# EAGLE board Schematic with only shield - Bottom Routing (EAGLE 6.5.0)
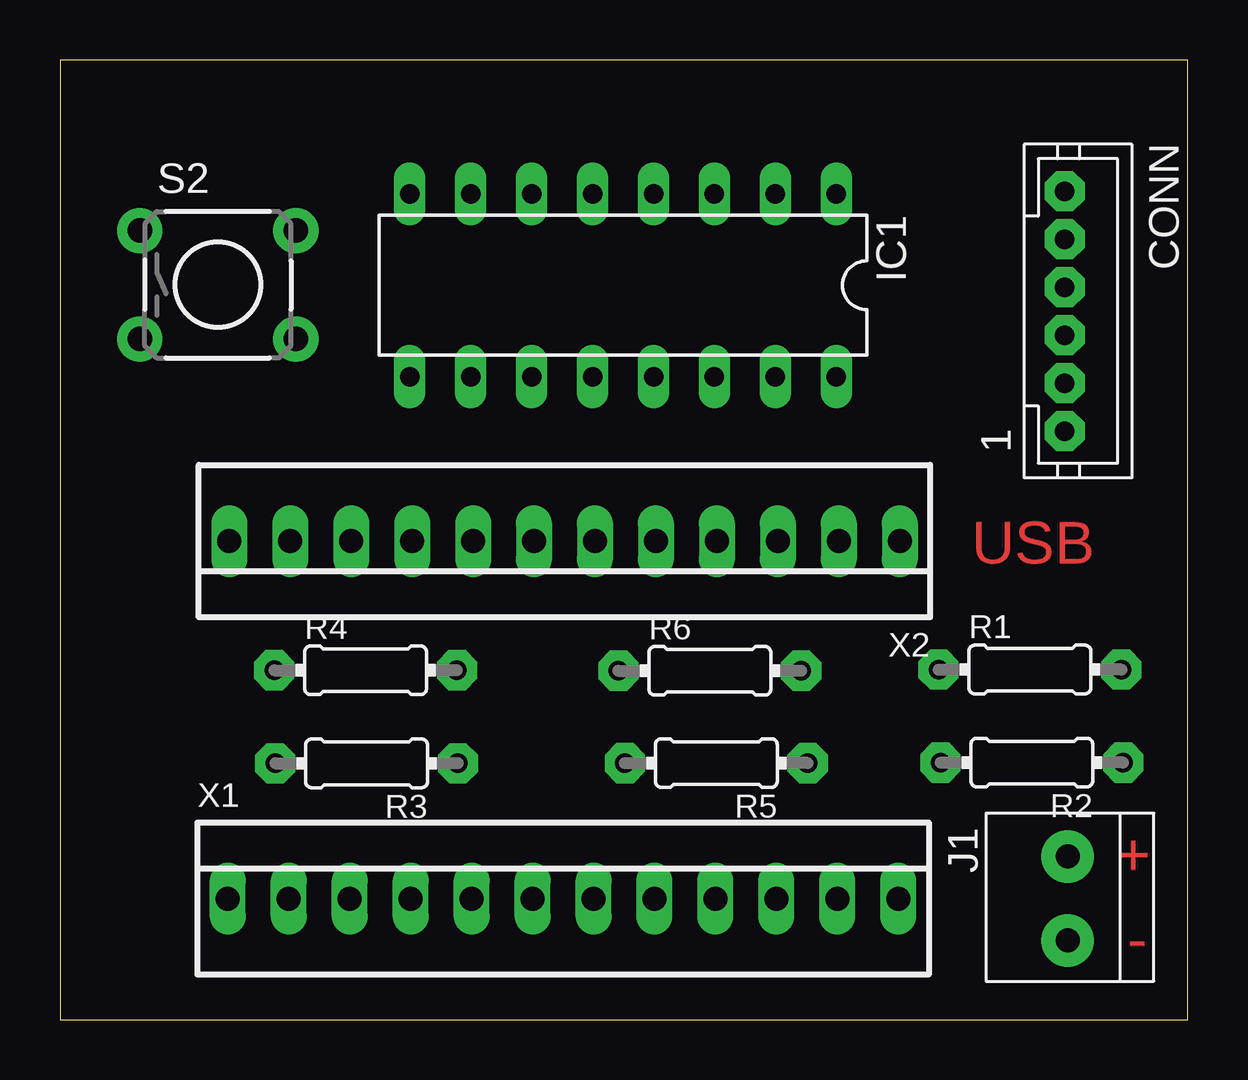
[diagram p0: board, top side]
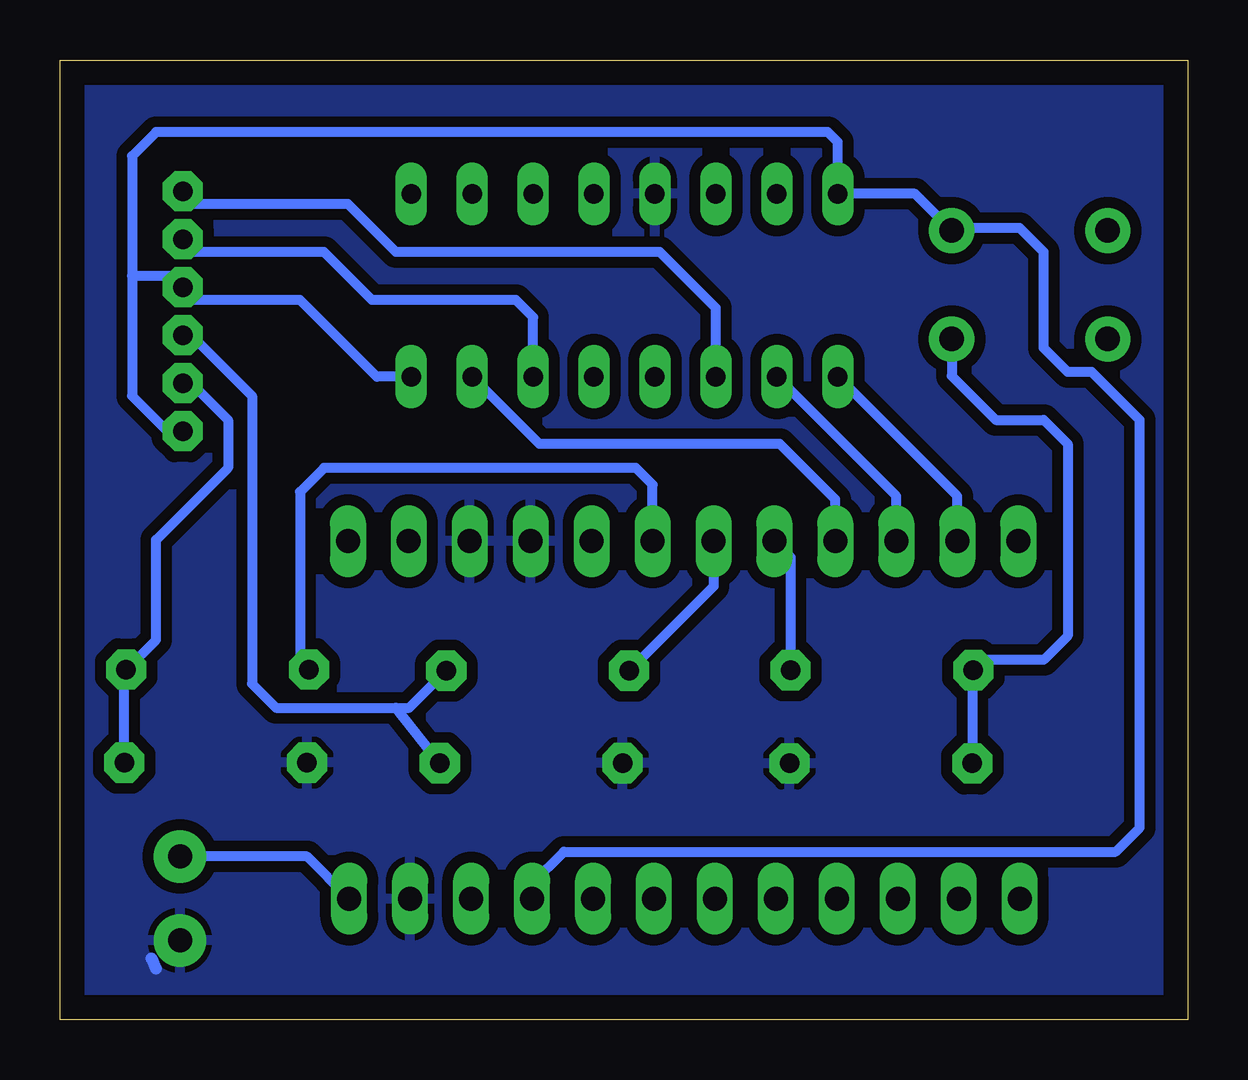
[diagram p1: board, bottom side, seen from below]

Size 47 x 40 mm. Coordinates in mm from the lower left corner, seen from the top.
Outline: 0,0 47,0 47,40 0,40 0,0
Copper layers (1*16): Top 0.035mm / dielectric 1.5mm / Bottom 0.035mm
Design rules "default *": minimum track width 10mil, minimum drill 24mil, track to track 8mil, track to pad 10mil, pad to pad 10mil, via to via 8mil, smd to smd 8mil, copper to edge 40mil, drill to drill 12mil, minimum pad ring 10mil, minimum via ring 8mil, stop-mask expansion 4mil, vias tented up to drill 0mil, thermal gap 10mil
Net classes: 0 Default: width 0.508 mm, drill 0.508 mm, clearance 0.457 mm

## Footprints (pad centres in the part's own frame; a part is rotated, then mirrored left to right if it is on the bottom)
JST-PH6 = drill 0.813 pad 1.676 octagon: 1 5,0; 2 3,0; 3 1,0; 4 -1,0; 5 -3,0; 6 -5,0
DIL16 = drill 0.813 long: 1 -8.89,-3.81; 2 -6.35,-3.81; 3 -3.81,-3.81; 4 -1.27,-3.81; 5 1.27,-3.81; 6 3.81,-3.81; 7 6.35,-3.81; 8 8.89,-3.81; 9 8.89,3.81; 10 6.35,3.81; 11 3.81,3.81; 12 1.27,3.81; 13 -1.27,3.81; 14 -3.81,3.81; 15 -6.35,3.81; 16 -8.89,3.81
1X2-3.5MM = drill 1 pad 2.184: 1 1.8,0; 2 -1.7,0
0204/7 = drill 0.813 pad 1.676 octagon: 1 -3.81,0; 2 3.81,0
TACTILE-PTH = drill 1.016 pad 1.88: 1 -3.251,2.261; 2 3.251,2.261; 3 -3.251,-2.261; 4 3.251,-2.261
22-23-2121 = drill 1 long: 1 -13.97,0; 2 -11.43,0; 3 -8.89,0; 4 -6.35,0; 5 -3.81,0; 6 -1.27,0; 7 1.27,0; 8 3.81,0; 9 6.35,0; 10 8.89,0; 11 11.43,0; 12 13.97,0

## Placement (x,y rotation side)
CONN  [JST-PH6]  41.88,29.53 270 top
IC1  L293D  [DIL16]  23.47,30.61 180 top
J1  1X2-3.5MM  [1X2-3.5MM]  42,5 90 top
R1  100  [0204/7]  40.43,14.59 0 top
R2  10K  [0204/7]  40.51,10.71 180 top
R3  10K  [0204/7]  12.78,10.68 180 top
R4  100  [0204/7]  12.74,14.56 0 top
R5  10K  [0204/7]  27.36,10.69 180 top
R6  100  [0204/7]  27.09,14.54 0 top
S2  [TACTILE-PTH]  6.58,30.63 0 top
X1  22-23-2121  [22-23-2121]  20.97,5.04 0 top
X2  22-23-2121  [22-23-2121]  21.03,19.94 180 top

## Library data of the parts
CONN = jst-ph; OC_FARNELL: unknown
IC1 = st-microelectronics; MF: TEXAS INSTRUMENTS; MPN: L293DNEE4; OC_FARNELL: 9589619; OC_NEWARK: 56P8249
J1 = adafruit
R1 R4 R6 = adafruit; MF: STANLEY FAT MAX; MPN: 0-65-425; OC_FARNELL: 1520953
R2 R3 R5 = adafruit; OC_FARNELL: unknown
S2 = SparkFun; OC_FARNELL: unknown
X1 X2 = con-molex; MF: MOLEX; MPN: 22-23-2121; OC_FARNELL: 1462935; OC_NEWARK: 56H0456

## Nets
D3: R1.1 X2.6
D4: R6.1 X2.7
D5: R4.2 X2.8
D6: IC1.15 X2.9
D7: IC1.10 X2.10
D8: IC1.9 X2.11
GND: IC1.5 J1.2 R2.2 R3.1 R5.2 X1.11 X2.3 X2.4
GND1: IC1.4
GND3: IC1.13
GND4: IC1.12
N$1: R3.2 R4.1 S2.4
N$2: CONN.3 R5.1 R6.2
N$3: CONN.2 R1.2 R2.1
N$4: CONN.6 IC1.11
N$5: CONN.5 IC1.14
RAW: J1.1 X1.12
VCC: CONN.1 CONN.4 IC1.8 IC1.16 S2.2 X1.9

## Tracks (layer width: path | path; a pad name or v marks a point on that pad's centre or on a via)
D3
  Bottom 0.406: X2.6 22.3,22.3 23,23 36,23 37,22 37,14.97 R1.1
D4
  Bottom 0.406: X2.7 19.76,18.06 R6.1
D5
  Bottom 0.406: X2.8 16.55,19.27 R4.2
D6
  Bottom 0.406: X2.9 14.68,21.68 17,24 27.02,24 IC1.15
D7
  Bottom 0.406: X2.10 12.14,21.82 IC1.10
D8
  Bottom 0.406: X2.11 9.6,21.82 IC1.9
GND
  Bottom 0.508: 43.18,2.54 43.01,2.12
  pour Bottom: 0,40 47,40 47,0 0,0
N$1
  Bottom 0.406: R3.2 8.97,14.52 R4.1 8.49,15 6,15 5,16 5,24 6,25 8,25 9.83,26.83 S2.4
N$2
  Bottom 0.406: CONN.3 41.53,28.53 39,26 39,14 38,13 33,13 | 33,13 32.44,13 R6.2 | R5.1 33,13
N$3
  Bottom 0.406: CONN.2 41.53,26.53 40,25 40,23 43,20 43,15.83 R1.2 44.32,14.51 R2.1
N$4
  Bottom 0.406: IC1.11 19.66,29.66 22,32 33,32 35,34 41.35,34 CONN.6
N$5
  Bottom 0.406: IC1.14 27.28,29.28 28,30 34,30 36,32 41.35,32 CONN.5
RAW
  Bottom 0.406: X1.12 36.7,6.8 J1.1
VCC
  Bottom 0.406: IC1.16 33.8,26.8 37,30 41.35,30 CONN.4 42.35,31 44,31 | 44,31 44,36 43,37 15,37 14.58,36.58 IC1.8 11.36,34.42 S2.2 9.72,33 7,33 6,32 6,28 5,27 4,27 2,25 2,8 3,7 26,7 27.32,5.68 X1.9 | 44,31 44,26 42.53,24.53 CONN.1

## Text on the board
Top: USB | + | -